# Altium PCB PCB4.0.PcbDoc (part 2 of 4)
Units mm, origin at the board's own origin, x right, y up, seen from the top; angles counter-clockwise.
Board outline 152.4 x 101.6 mm, 4 copper layers (Top Layer, Mid-Layer 1, Mid-Layer 2, Bottom Layer); 258 components, 506 nets, 1709 pads, 919 vias.
Unrouted connection lines stored in the file: 79.
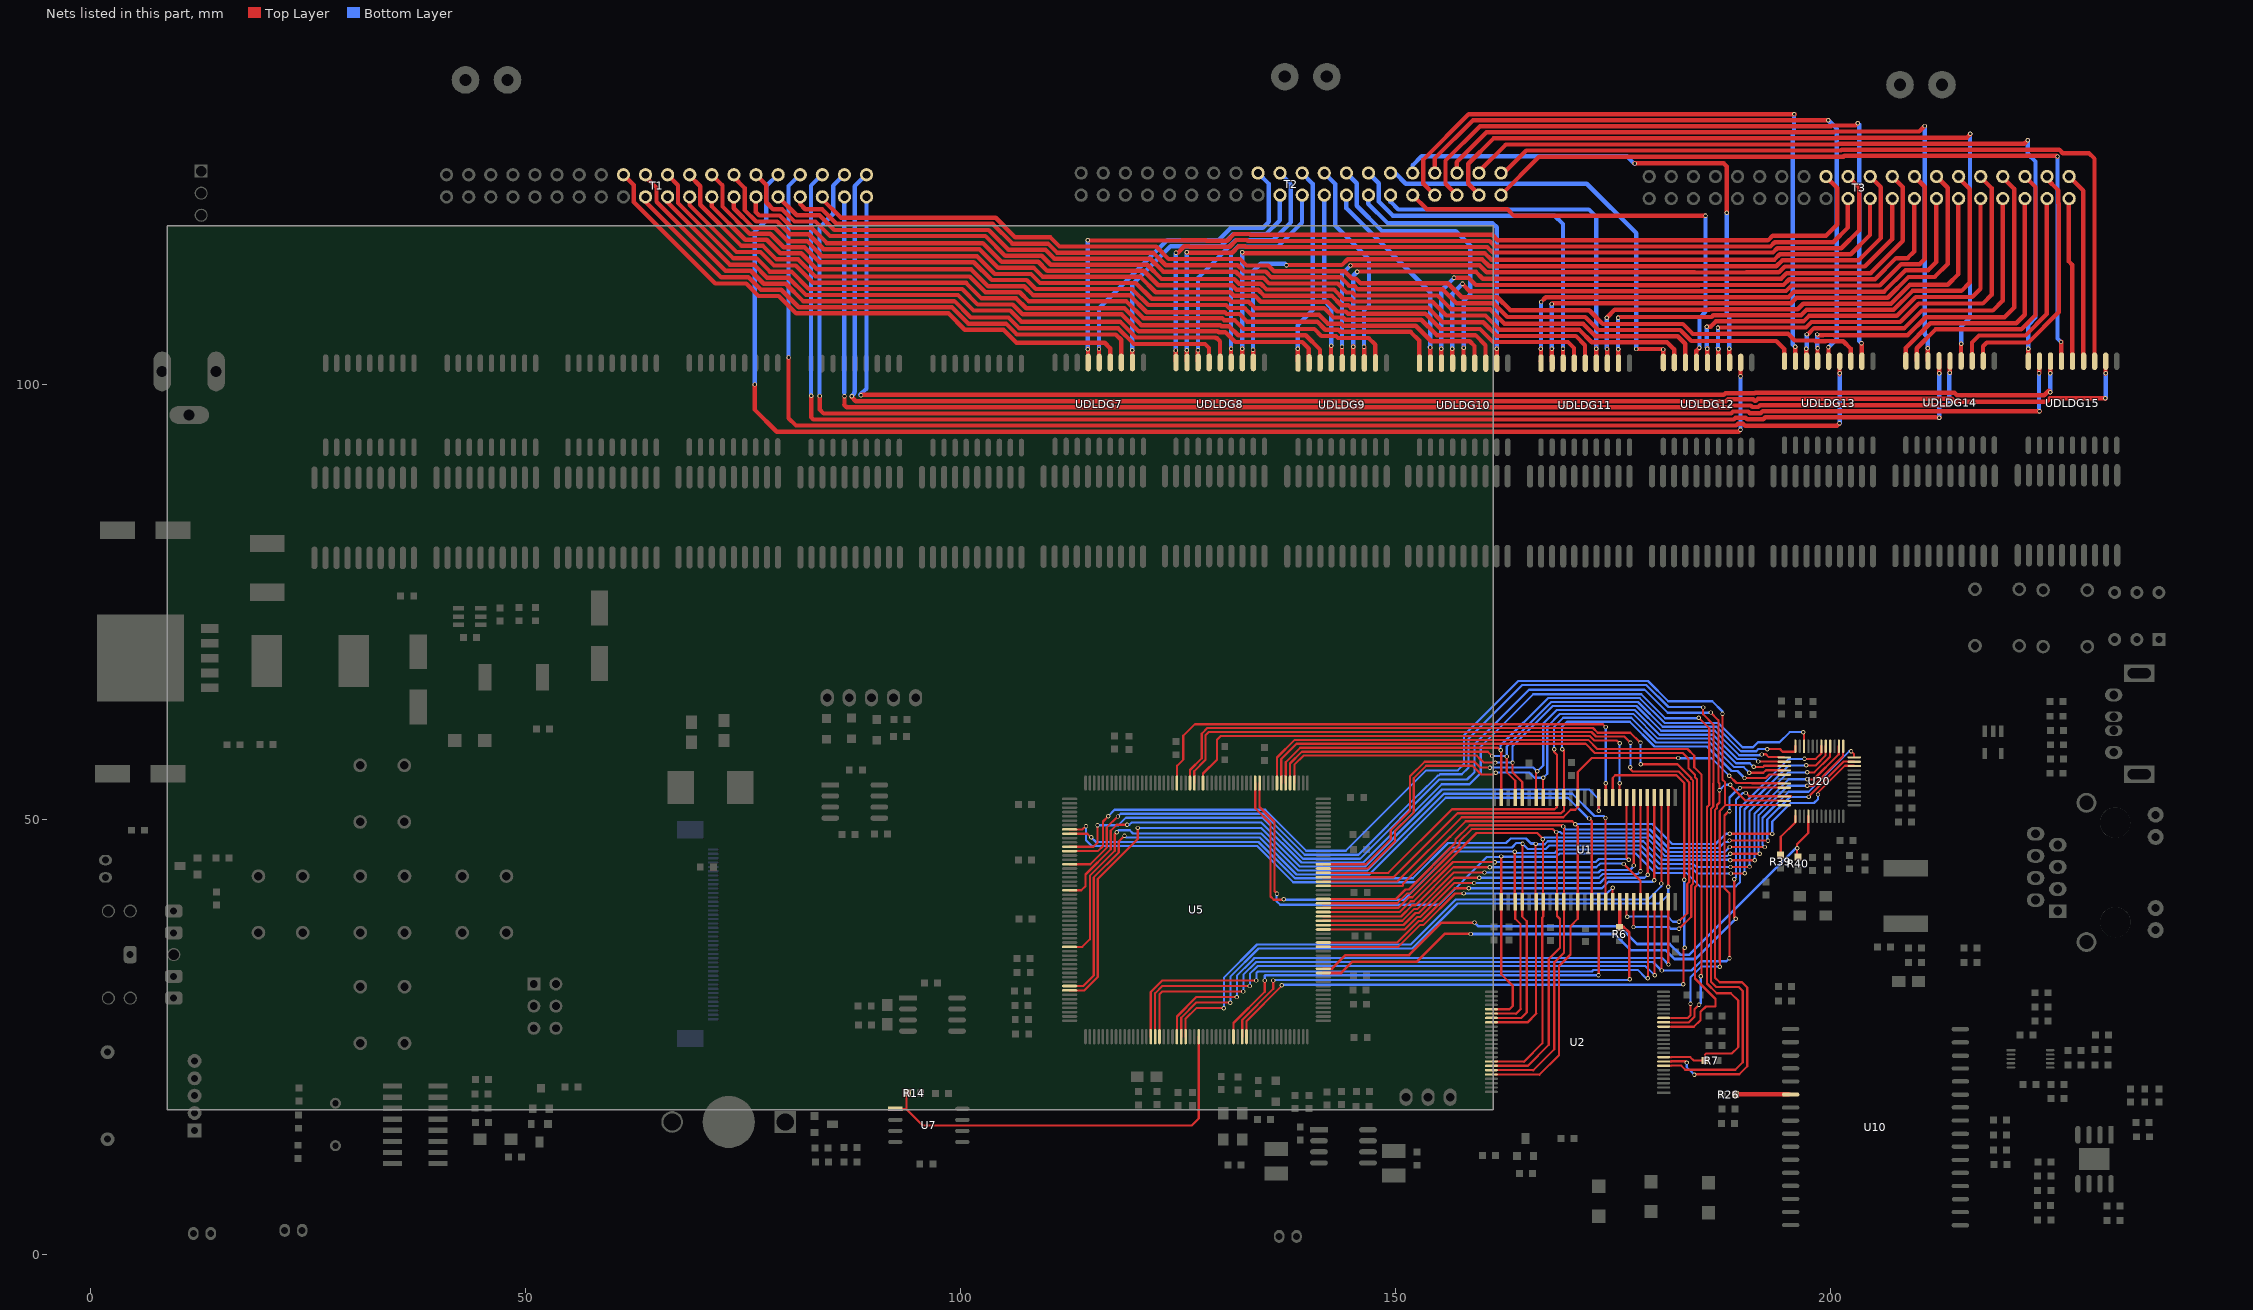
[diagram p4: the nets of this part, all layers, seen from the top]

## Via types
v1: diameter 0.5, hole 0.3, Top Layer to Bottom Layer, 919 vias

## Nets (pads, with @x,y where several pads share a name; then routed paths per layer and width w, separated by ;. In a path a pad name is that pad's centre, name@x,y a point inside that pad or via, vN(x,y) a via of type N, cw(c..) or ccw(c..) an arc to the next point about the centre after c; other vN are vias at no path point) (continued)
DOT52: T3.29 UDLDG7.15 | length 107.7
  Top Layer w0.5: v1(114.625,116.525) 114.648,116.502 125.378,116.502 125.397,116.521 128.203,116.521 128.253,116.471 130.635,116.471 131.408,117.244 133.217,117.244 133.321,117.14 157.644,117.14 157.648,117.144 161.081,117.144 161.718,116.507 192.769,116.507 193.312,117.05 199.45,117.05 200.725,118.325 200.725,122.525 199.42,123.83 T3.29@199.42,123.875 ; UDLDG7.15@114.635,102.502 v1@114.635,104.04
  Bottom Layer w0.5: v1(114.625,104) v1(114.625,116.525)
DOT53: T2.29 UDLDG7.14 | length 36
  Top Layer w0.5: UDLDG7.14@115.905,102.502 v1@115.905,104.047
  Bottom Layer w0.5: v1(115.9,104.025) 115.9,108.7 123.725,116.525 129.625,116.525 131.042,117.942 134.717,117.942 135.42,118.645 135.42,123 T2.29@134.145,124.275
DOT54: T1.29 UDLDG7.13 | length 67
  Top Layer w0.5: T1.29@61.22,124.075 62.43,122.865 62.43,120.92 71.8,111.55 75.35,111.55 76.775,110.125 79.1,110.125 81.094,108.131 89.344,108.131 89.35,108.125 98.6,108.125 100.477,106.248 104.926,106.248 106.424,104.75 116.55,104.75 117.175,104.125 UDLDG7.13@117.175,102.502
DOT55: T1.10 UDLDG7.12 | length 64.4
  Top Layer w0.5: T1.10@63.76,121.535 63.76,120.99 72.475,112.275 75.612,112.275 77.062,110.825 79.387,110.825 81.383,108.829 89.821,108.829 89.825,108.825 99,108.825 100.879,106.946 105.215,106.946 106.461,105.7 117.826,105.7 118.445,105.081 UDLDG7.12@118.445,102.502
DOT56: T2.10 UDLDG7.11 | length 31.9
  Top Layer w0.5: UDLDG7.11@119.715,102.502 v1@119.715,103.892
  Bottom Layer w0.5: v1(119.725,103.875) 119.725,111.425 124.125,115.825 129.912,115.825 131.331,117.244 133.217,117.244 133.232,117.229 135.079,117.229 136.685,118.835 T2.10@136.685,121.735
DOT57: T3.10 UDLDG8.18 | length 94.9
  Top Layer w0.5: UDLDG8.18@124.725,102.602 v1@124.725,103.9 ; v1(124.75,115.1) 124.963,115.1 125.686,115.823 126.264,115.823 126.312,115.775 127.962,115.775 127.964,115.773 130.924,115.773 131.697,116.546 132.928,116.546 133.032,116.442 157.933,116.442 157.937,116.446 160.792,116.446 161.429,115.809 193.058,115.809 193.549,116.3 200.275,116.3 201.96,117.985 T3.10@201.96,121.335
  Bottom Layer w0.5: v1(124.725,103.85) v1@124.725,115.05
DOT58: T3.30 UDLDG8.17 | length 98.2
  Top Layer w0.5: v1@125.975,115.075 131.213,115.075 131.986,115.848 132.639,115.848 132.743,115.744 158.222,115.744 158.226,115.748 160.503,115.748 161.14,115.111 193.347,115.111 193.838,115.602 201.202,115.602 203.25,117.65 203.25,122.585 T3.30@201.96,123.875 ; UDLDG8.17@125.995,102.602 v1@125.995,103.87
  Bottom Layer w0.5: v1(125.975,115.125) 125.979,115.125 126,115.104 v1(126,103.9)
DOT59: T2.30 UDLDG8.16 | length 29.1
  Top Layer w0.5: UDLDG8.16@127.265,102.602 v1@127.265,103.892
  Bottom Layer w0.5: v1(127.275,103.9) 127.275,112.2 131.621,116.546 132.928,116.546 132.966,116.508 135.858,116.508 137.95,118.6 137.95,122.975 136.685,124.24 T2.30@136.685,124.275
DOT60: T1.30 UDLDG8.15 | length 75.6
  Top Layer w0.5: T1.30@63.76,124.075 63.76,123.865 65.05,122.575 65.05,120.95 72.975,113.025 75.875,113.025 77.377,111.523 79.902,111.523 81.898,109.527 99.285,109.527 101.168,107.644 105.504,107.644 106.75,106.398 118.115,106.398 119.913,104.6 128.075,104.6 128.535,104.14 UDLDG8.15@128.535,102.602
DOT61: T1.11 UDLDG8.14 | length 73.1
  Top Layer w0.5: T1.11@66.3,121.535 66.3,120.9 73.475,113.725 76.25,113.725 77.754,112.221 80.229,112.221 82.225,110.225 99.7,110.225 101.475,108.45 105.7,108.45 106.975,107.175 118.325,107.175 120.152,105.348 129.294,105.348 129.391,105.251 129.474,105.251 129.805,104.92 UDLDG8.14@129.805,102.602
DOT62: T2.11 UDLDG8.13 | length 25.3
  Top Layer w0.5: UDLDG8.13@131.075,102.602 v1@131.075,104.1
  Bottom Layer w0.5: v1(131.075,104.075) 131.075,115 131.923,115.848 132.639,115.848 132.677,115.81 136.485,115.81 139.225,118.55 T2.11@139.225,121.735
DOT63: T3.11 UDLDG8.12 | length 90.5
  Top Layer w0.5: UDLDG8.12@132.345,102.602 v1@132.345,104.095 ; v1(132.35,115.15) 132.454,115.046 158.511,115.046 158.515,115.05 160.214,115.05 160.964,114.3 193.523,114.3 194.127,114.904 202.279,114.904 204.5,117.125 T3.11@204.5,121.335
  Bottom Layer w0.5: v1(132.35,104.05) v1(132.35,115.15)
DOT64: T3.31 UDLDG8.11 | length 92.5
  Top Layer w0.5: UDLDG8.11@133.615,102.602 v1@133.615,103.96 ; v1@137.55,113.675 143.813,113.675 144.486,114.348 158.8,114.348 158.802,114.35 159.927,114.35 160.752,113.525 184.079,113.525 184.109,113.555 190.541,113.555 190.571,113.525 193.736,113.525 194.417,114.206 203.181,114.206 205.75,116.775 205.75,122.625 T3.31@204.5,123.875
  Bottom Layer w0.5: v1(133.6,103.925) 133.6,112.95 134.475,113.825 137.275,113.825 v1(137.45,113.65)
DOT65: T2.31 UDLDG9.18 | length 22.9
  Top Layer w0.5: UDLDG9.18@138.75,102.602 v1(138.75,104.05)
  Bottom Layer w0.5: v1@138.75,104.025 138.75,106.775 140.475,108.5 140.475,123 139.225,124.25 T2.31@139.225,124.275
DOT66: T1.31 UDLDG9.17 | length 84.7
  Top Layer w0.5: T1.31@66.3,124.075 67.525,122.85 67.525,120.8 73.85,114.475 76.525,114.475 78.081,112.919 80.556,112.919 82.55,110.925 100.173,110.925 101.95,109.148 105.989,109.148 107.137,108 118.525,108 120.45,106.075 129.555,106.075 129.681,105.949 130.426,105.949 131.55,104.825 139.25,104.825 140.02,104.055 UDLDG9.17@140.02,102.602
DOT67: T1.12 UDLDG9.16 | length 81.6
  Top Layer w0.5: T1.12@68.84,121.535 68.84,120.585 74.25,115.175 77,115.175 78.55,113.625 81.05,113.625 83.052,111.623 100.627,111.623 102.404,109.846 106.402,109.846 107.55,108.698 118.827,108.698 120.752,106.773 129.844,106.773 129.97,106.647 130.853,106.647 131.9,105.6 139.65,105.6 141.29,103.96 UDLDG9.16@141.29,102.602
DOT68: T2.12 UDLDG9.15 | length 19.4
  Top Layer w0.5: UDLDG9.15@142.56,102.602 v1@142.56,104.325
  Bottom Layer w0.5: T2.12@141.765,121.735 141.765,109.585 142.575,108.775 v1@142.575,104.425
  other v1: 142.575,104.4
DOT69: T3.12 UDLDG9.14 | length 80.3
  Top Layer w0.5: v1@143.825,104.225 143.83,104.22 UDLDG9.14@143.83,102.602 ; v1@144.775,113.65 144.777,113.648 145.864,113.648 145.866,113.65 159.625,113.65 160.448,112.827 184.368,112.827 184.37,112.825 190.28,112.825 190.282,112.827 194.025,112.827 194.698,113.5 203.9,113.5 207.04,116.64 T3.12@207.04,121.335
  Bottom Layer w0.5: v1(143.825,104.275) 143.825,112.65 v1(144.8,113.625)
DOT70: T3.32 UDLDG9.13 | length 84
  Top Layer w0.5: UDLDG9.13@145.1,102.602 v1@145.1,104.375 ; v1@145.575,112.95 145.6,112.925 156.434,112.925 156.436,112.923 157.039,112.923 ; 157.097,112.921 157.099,112.923 159.223,112.923 159.225,112.921 ; 158.547,112.925 159.175,112.925 160,112.1 184.628,112.1 184.655,112.073 184.751,112.073 184.762,112.084 190.006,112.084 190.022,112.1 194.285,112.1 194.935,112.75 204.575,112.75 208.275,116.45 208.275,122.64 T3.32@207.04,123.875
  Bottom Layer w0.5: v1(145.125,104.3) 145.125,112.45 v1(145.575,112.9)
DOT71: T2.32 UDLDG9.12 | length 24.1
  Top Layer w0.5: UDLDG9.12@146.37,102.602 v1@146.37,104.295
  Bottom Layer w0.5: T2.32@141.765,124.275 143.05,122.99 143.05,118.225 146.925,114.35 146.925,109.025 146.35,108.45 v1(146.35,104.275)
DOT72: T1.32 UDLDG9.11 | length 90.1
  Top Layer w0.5: T1.32@68.84,124.075 68.84,123.96 70.075,122.725 70.075,120.6 74.802,115.873 77.289,115.873 78.839,114.323 81.339,114.323 83.312,112.35 101.05,112.35 102.856,110.544 106.802,110.544 107.846,109.5 119.05,109.5 121,107.55 130.054,107.55 130.259,107.345 131.48,107.345 132.5,106.325 140.65,106.325 141.45,105.525 143.129,105.525 143.359,105.295 146.88,105.295 147.64,104.535 UDLDG9.11@147.64,102.602
DOT73: T1.13 UDLDG10.18 | length 91.2
  Top Layer w0.5: T1.13@71.38,121.535 71.38,120.445 75.25,116.575 77.725,116.575 79.279,115.021 81.679,115.021 83.525,113.175 101.225,113.175 103.158,111.242 107.308,111.242 108.33,110.22 119.418,110.22 121.39,108.248 130.343,108.248 130.548,108.043 132.032,108.043 132.9,107.175 140.975,107.175 141.9,106.25 143.391,106.25 143.648,105.993 151.707,105.993 152.7,105 UDLDG10.18@152.7,102.577
DOT74: T2.13 UDLDG10.17 | length 23.3
  Top Layer w0.5: UDLDG10.17@153.97,102.577 v1@153.97,104.205
  Bottom Layer w0.5: T2.13@144.305,121.735 144.305,120.22 153.975,110.55 153.975,104.175 v1@153.9,104.25
  other v1: 153.975,104.2
DOT75: T3.13 UDLDG10.16 | length 71.2
  Top Layer w0.5: UDLDG10.16@155.24,102.577 v1@155.24,104.11 ; v1(156.7,112.2) 156.723,112.223 158.352,112.223 159.2,111.375 177.786,111.375 177.794,111.367 184.882,111.367 184.89,111.375 185.04,111.375 185.051,111.386 194.558,111.386 195.222,112.05 205.079,112.05 207.5,114.471 208.821,114.471 209.58,115.23 T3.13@209.58,121.335
  Bottom Layer w0.5: v1(155.225,104.075) 155.225,110.725 v1(156.7,112.2)
DOT76: T3.33 UDLDG10.15 | length 74.5
  Top Layer w0.5: UDLDG10.15@156.51,102.577 v1@156.51,104.065 ; v1(157.675,111.525) 157.773,111.427 157.773,111.377 158.475,110.675 177.498,110.675 177.504,110.669 185.171,110.669 185.179,110.677 185.329,110.677 185.34,110.688 194.847,110.688 195.484,111.325 205.627,111.325 208.075,113.773 210.198,113.773 210.79,114.365 210.79,122.665 T3.33@209.58,123.875
  Bottom Layer w0.5: v1(156.5,104.05) 156.5,110.35 v1(157.675,111.525)
DOT77: T2.33 UDLDG10.14 | length 32.9
  Top Layer w0.5: UDLDG10.14@157.78,102.577 v1@157.78,104.195
  Bottom Layer w0.5: T2.33@144.305,124.275 145.515,123.065 145.515,120.485 148.425,117.575 156.9,117.575 158.55,115.925 158.55,110.275 157.8,109.525 v1(157.8,104.15)
DOT78: T1.33 UDLDG10.13 | length 99.1
  Top Layer w0.5: T1.33@71.38,124.075 72.625,122.83 72.625,120.4 75.75,117.275 78.125,117.275 79.675,115.725 82.05,115.725 83.775,114 101.515,114 103.565,111.95 107.587,111.95 108.619,110.918 119.707,110.918 121.55,109.075 130.503,109.075 130.837,108.741 132.634,108.741 133.425,107.95 141.187,107.95 142.189,106.948 143.68,106.948 143.937,106.691 152.309,106.691 154.075,104.925 158.5,104.925 159.05,104.375 UDLDG10.13@159.05,102.577
DOT79: T1.14 UDLDG10.12 | length 96.1
  Top Layer w0.5: T1.14@73.92,121.535 73.92,120.205 76.15,117.975 78.575,117.975 80.127,116.423 82.352,116.423 84.077,114.698 101.875,114.698 103.925,112.648 108.093,112.648 109.125,111.616 120.134,111.616 121.95,109.8 130.765,109.8 131.126,109.439 133.111,109.439 133.825,108.725 141.775,108.725 142.854,107.646 143.969,107.646 144.226,107.389 152.936,107.389 154.702,105.623 159.152,105.623 160.32,104.455 UDLDG10.12@160.32,102.577
DOT80: T2.14 UDLDG10.11 | length 32.4
  Top Layer w0.5: UDLDG10.11@161.59,102.577 161.59,104.09 v1@161.6,104.1
  Bottom Layer w0.5: T2.14@146.845,121.735 146.845,120.705 149.05,118.5 161.125,118.5 161.6,118.025 v1@161.6,104.025
  other v1: 161.6,104.05
DOT81: T3.14 UDLDG11.18 | length 61.5
  Top Layer w0.5: UDLDG11.18@166.675,102.627 166.7,102.652 v1@166.7,104.127 ; v1(166.7,109.425) 167.246,109.971 185.46,109.971 185.468,109.979 185.618,109.979 185.629,109.99 195.136,109.99 195.771,110.625 206.125,110.625 208.575,113.075 211.175,113.075 212.12,114.02 T3.14@212.12,121.335
  Bottom Layer w0.5: v1(166.675,104.075) 166.7,104.1 v1(166.7,109.425)
DOT82: T3.34 UDLDG11.17 | length 64.6
  Top Layer w0.5: v1(167.925,109.2) 167.998,109.273 185.75,109.273 185.758,109.281 185.908,109.281 185.919,109.292 195.425,109.292 196.06,109.927 206.552,109.927 208.925,112.3 211.925,112.3 213.425,113.8 213.425,122.57 T3.34@212.12,123.875 ; UDLDG11.17@167.945,102.627 v1@167.945,104.08
  Bottom Layer w0.5: v1(167.925,109.2) 167.925,104.15 167.975,104.1 v1(167.95,104.075)
DOT83: T2.34 UDLDG11.16 | length 41.8
  Top Layer w0.5: UDLDG11.16@169.215,102.627 v1@169.215,104.09
  Bottom Layer w0.5: T2.34@146.845,124.275 148.055,123.065 148.055,120.97 149.675,119.35 168.275,119.35 169.225,118.4 v1(169.225,104.075)
DOT84: T1.34 UDLDG11.15 | length 108
  Top Layer w0.5: T1.34@73.92,124.075 73.92,123.78 75.175,122.525 75.175,120 76.502,118.673 78.927,118.673 80.375,117.225 82.55,117.225 84.275,115.5 102.171,115.5 104.325,113.346 108.418,113.346 109.45,112.314 120.661,112.314 122.425,110.55 131.002,110.55 131.415,110.137 133.811,110.137 134.486,109.462 142.163,109.462 143.281,108.344 144.258,108.344 144.515,108.087 153.411,108.087 155.173,106.325 159.675,106.325 161.175,104.825 169.8,104.825 170.485,104.14 UDLDG11.15@170.485,102.627
DOT85: T1.15 UDLDG11.14 | length 105.2
  Top Layer w0.5: T1.15@76.46,121.535 76.46,119.765 76.85,119.375 79.212,119.375 80.637,117.95 82.875,117.95 84.627,116.198 102.552,116.198 104.706,114.044 108.906,114.044 109.938,113.012 121.038,113.012 122.7,111.35 131.189,111.35 131.704,110.835 134.19,110.835 134.865,110.16 142.628,110.16 143.746,109.042 144.547,109.042 144.804,108.785 153.7,108.785 155.385,107.1 160.05,107.1 161.627,105.523 170.089,105.523 170.091,105.525 170.7,105.525 171.755,104.47 UDLDG11.14@171.755,102.627
DOT86: T2.15 UDLDG11.13 | length 41.8
  Top Layer w0.5: UDLDG11.13@173.025,102.627 v1@173.025,104.1
  Bottom Layer w0.5: T2.15@149.385,121.735 149.385,120.965 150.3,120.05 172.2,120.05 173.025,119.225 v1(173.025,104.075)
DOT87: T3.15 UDLDG11.12 | length 56.1
  Top Layer w0.5: v1(174.25,107.625) 175.177,108.552 186.016,108.552 186.047,108.583 ; v1@174.275,104.075 174.295,104.055 UDLDG11.12@174.295,102.627 ; 186.208,108.594 196.194,108.594 196.829,109.229 206.917,109.229 209.088,111.4 213.425,111.4 214.66,112.635 T3.15@214.66,121.335
  Bottom Layer w0.5: v1(174.25,107.625) 174.25,104.05 v1(174.275,104.025)
DOT88: T3.35 UDLDG11.11 | length 59.9
  Top Layer w0.5: v1(175.55,107.625) 175.625,107.7 186.301,107.7 186.497,107.896 196.571,107.896 197.206,108.531 207.206,108.531 209.377,110.702 215.002,110.702 215.975,111.675 215.975,122.4 214.66,123.715 T3.35@214.66,123.875 ; UDLDG11.11@175.565,102.627 v1@175.565,104.035
  Bottom Layer w0.5: v1(175.55,107.625) 175.55,104.075 175.6,104.025 v1(175.575,104)
DOT89: T2.35 UDLDG12.18 | length 48.9
  Top Layer w0.5: v1(177.65,104.025) 180.675,104.025 v1(180.725,103.975) UDLDG12.18@180.725,102.602
  Bottom Layer w0.5: T2.35@149.385,124.275 149.9,124.275 151.15,123.025 171.95,123.025 177.652,117.323 v1@177.652,104.025
DOT90: T1.35 UDLDG12.17 | length 116.4
  Top Layer w0.5: T1.35@76.46,124.075 77.67,122.865 77.67,120.88 78.477,120.073 79.501,120.073 80.899,118.675 83.325,118.675 84.992,117.008 102.842,117.008 105.108,114.742 109.318,114.742 110.35,113.71 121.44,113.71 123.075,112.075 131.452,112.075 131.994,111.533 134.481,111.533 135.156,110.858 142.917,110.858 144.025,109.75 144.827,109.75 145.094,109.483 154.192,109.483 155.792,107.883 160.317,107.883 161.979,106.221 169.8,106.221 169.802,106.223 171.102,106.223 172.525,104.8 181.175,104.8 181.995,103.98 UDLDG12.17@181.995,102.602
DOT91: T1.16 UDLDG12.16 | length 113.3
  Top Layer w0.5: T1.16@79,121.535 79.026,121.535 81.161,119.4 83.775,119.4 85.469,117.706 103.219,117.706 105.485,115.44 109.743,115.44 110.775,114.408 121.792,114.408 123.3,112.9 131.614,112.9 132.283,112.231 134.77,112.231 135.445,111.556 143.319,111.556 144.35,110.525 145.039,110.525 145.383,110.181 154.792,110.181 156.392,108.581 160.844,108.581 162.506,106.919 169.511,106.919 169.513,106.921 171.529,106.921 172.946,105.504 182.396,105.504 183.265,104.635 UDLDG12.16@183.265,102.602
DOT92: T2.16 UDLDG12.15 | length 51.8
  Top Layer w0.5: T2.16@151.925,121.735 153.56,120.1 162.825,120.1 163.6,119.325 v1@185.575,119.325 ; UDLDG12.15@184.535,102.602 184.535,103.81 v1@184.85,104.125
  Bottom Layer w0.5: v1(184.9,104.175) 184.9,107.6 185.6,108.3 v1(185.6,119.35)
DOT93: T3.16 UDLDG12.14 | length 47.6
  Top Layer w0.5: v1(185.75,106.6) 186.188,106.6 186.786,107.198 196.86,107.198 197.495,107.833 207.583,107.833 209.754,110.004 216.254,110.004 217.2,110.95 T3.16@217.2,121.335 ; UDLDG12.14@185.805,102.602 v1@185.805,104.095
  Bottom Layer w0.5: v1(185.75,106.6) 185.75,104.25 v1@185.8,104.2
  other v1: 185.8,104.075
DOT94: T3.36 UDLDG12.13 | length 51
  Top Layer w0.5: UDLDG12.13@187.075,102.602 v1@187.075,104 ; v1@187.075,106.5 197.149,106.5 197.774,107.125 207.975,107.125 210.1,109.25 217.475,109.25 218.475,110.25 218.475,122.525 217.2,123.8 T3.36@217.2,123.875
  Bottom Layer w0.5: v1(187.025,106.45) 187.025,104.225 186.975,104.175 187.1,104.05 v1(187.05,104)
DOT95: T2.36 UDLDG12.12 | length 60.4
  Top Layer w0.5: v1(177.45,125.35) 177.475,125.375 187.675,125.375 188.05,125 v1@188.05,119.7 ; UDLDG12.12@188.345,102.602 v1@188.345,104.07
  Bottom Layer w0.5: T2.36@151.925,124.275 151.925,125.125 152.975,126.175 176.575,126.175 v1@177.45,125.3 ; v1(188.025,119.675) 188.025,108.05 188.325,107.75 v1(188.325,104.075)
DOT96: T1.36 UDLDG12.11 | length 150.4
  Top Layer w0.5: v1(76.325,99.95) 76.325,97.075 78.871,94.529 189.404,94.529 v1(189.625,94.75) ; v1@189.615,100.885 189.615,102.602 UDLDG12.11@189.625,102.592
  Bottom Layer w0.5: v1(76.325,99.95) 76.325,117.475 77.67,118.82 77.67,122.745 T1.36@79,124.075 ; v1(189.625,94.75) v1(189.625,100.9)
DOT97: T1.17 UDLDG13.18 | length 122.2
  Top Layer w0.5: T1.17@81.54,121.535 81.54,120.71 82.152,120.098 84.077,120.098 85.771,118.404 103.684,118.404 105.95,116.138 110.043,116.138 111.075,115.106 122.119,115.106 123.575,113.65 131.851,113.65 132.572,112.929 135.059,112.929 135.734,112.254 143.696,112.254 144.675,111.275 145.276,111.275 145.672,110.879 155.396,110.879 156.996,109.279 161.246,109.279 162.825,107.7 171.775,107.7 173.273,106.202 182.698,106.202 183.95,104.95 193.725,104.95 194.65,104.025 UDLDG13.18@194.65,102.652
DOT98: T2.17 UDLDG13.17 | length 78
  Top Layer w0.5: T2.17@154.465,121.735 153.175,123.025 153.175,125.8 158.396,131.021 v1@195.85,131.021 ; UDLDG13.17@195.92,102.652 v1@195.92,104.305
  Bottom Layer w0.5: v1(195.775,131.025) 195.775,129 195.625,128.85 195.625,104.55 v1(195.9,104.275)
DOT99: T3.17 UDLDG13.16 | length 38.9
  Top Layer w0.5: UDLDG13.16@197.19,102.652 197.19,104.065 v1@197.2,104.075 ; v1@197.35,105.7 198.075,106.425 208.45,106.425 210.475,108.45 218.625,108.45 219.74,109.565 T3.17@219.74,121.335
  Bottom Layer w0.5: v1(197.175,104.05) 197.225,104.1 v1(197.225,105.7)
DOT100: T3.37 UDLDG13.15 | length 42.7
  Top Layer w0.5: v1(198.45,105.7) 198.525,105.625 199.136,105.625 199.152,105.641 200.308,105.641 200.324,105.625 208.85,105.625 210.9,107.675 219.95,107.675 221.07,108.795 221.07,121.836 221.075,121.841 221.075,122.425 219.74,123.76 T3.37@219.74,123.875 ; UDLDG13.15@198.46,102.652 v1@198.46,104.165
  Bottom Layer w0.5: v1(198.45,105.7) 198.45,104.2 198.425,104.175 v1(198.475,104.125)
DOT101: T2.37 UDLDG13.14 | length 77.2
  Top Layer w0.5: T2.37@154.465,124.275 154.465,125.915 158.873,130.323 v1@199.725,130.323 ; UDLDG13.14@199.73,102.652 v1@199.73,104.245
  Bottom Layer w0.5: v1(199.7,130.325) 200.7,129.325 200.7,105.2 v1(199.725,104.225)
DOT102: T1.37 UDLDG13.13 | length 157.2
  Top Layer w0.5: v1(80.225,103.05) 80.225,96.075 81.073,95.227 189.115,95.227 189.336,95.448 189.914,95.448 190.158,95.204 200.704,95.204 v1@200.95,95.45 ; v1@201,101.125 UDLDG13.13@201,102.652
  Bottom Layer w0.5: v1(80.225,103.05) 80.225,122.76 T1.37@81.54,124.075 ; v1(201,95.475) 201.025,95.5 v1(201.025,101.225)
DOT103: T1.18 UDLDG13.12 | length 127
  Top Layer w0.5: T1.18@84.08,121.535 84.08,121.27 86.248,119.102 104.034,119.102 106.286,116.85 110.318,116.85 111.364,115.804 122.471,115.804 123.898,114.377 132.111,114.377 132.861,113.627 135.348,113.627 136.023,112.952 144.123,112.952 144.95,112.125 145.413,112.125 145.961,111.577 155.973,111.577 157.573,109.977 161.673,109.977 163.175,108.475 172.225,108.475 173.8,106.9 183,106.9 184.148,105.752 187.314,105.752 187.337,105.775 195.075,105.775 195.847,105.003 196.935,105.003 ; UDLDG13.12@202.27,102.652 202.27,104.08 201.423,104.927 200.035,104.927 200.019,104.943 199.441,104.943 199.425,104.927 198.236,104.927 198.16,105.003 197.515,105.003 197.514,105.002 196.936,105.002 ; 196.935,105.003 196.936,105.002
DOT104: T2.18 UDLDG13.11 | length 81.2
  Top Layer w0.5: T2.18@157.005,121.735 155.725,123.015 155.725,125.675 159.675,129.625 200.014,129.625 200.104,129.715 202.84,129.715 v1(203.1,129.975) v1@203.125,129.975 ; UDLDG13.11@203.54,102.652 v1@203.54,104.69
  Bottom Layer w0.5: v1(203.1,129.975) 203.25,129.825 203.25,104.95 v1(203.525,104.675)
DOT105: T3.18 UDLDG14.18 | length 30.1
  Top Layer w0.5: UDLDG14.18@208.6,102.677 208.6,104.15 211.427,106.977 221.302,106.977 222.28,107.955 T3.18@222.28,121.335
DOT106: T3.38 UDLDG14.17 | length 33.1
  Top Layer w0.5: UDLDG14.17@209.87,102.677 209.87,104.12 212.029,106.279 221.879,106.279 223.525,107.925 223.525,122.63 T3.38@222.28,123.875
DOT107: T2.38 UDLDG14.16 | length 83.9
  Top Layer w0.5: T2.38@157.005,124.275 157.005,125.505 160.427,128.927 200.303,128.927 200.393,129.017 210.167,129.017 v1(210.8,129.65) v1@210.825,129.65 ; UDLDG14.16@211.14,102.677 v1@211.14,104.185
  Bottom Layer w0.5: v1(210.8,129.65) 210.8,105.725 211.15,105.375 v1(211.15,104.125)
DOT108: T1.38 UDLDG14.15 | length 165.1
  Top Layer w0.5: v1(82.825,98.65) 82.825,96.225 82.8,96.2 83.075,95.925 188.826,95.925 189.047,96.146 190.203,96.146 190.389,95.96 192.246,95.96 192.459,96.173 202.198,96.173 ; 202.198,96.175 212.075,96.175 212.05,96.15 v1@212.5,96.15 ; v1@212.46,101.215 UDLDG14.15@212.46,102.702
  Bottom Layer w0.5: v1@82.805,98.675 82.805,122.8 T1.38@84.08,124.075 ; v1(212.45,101.225) 212.51,101.165 212.475,101.129 v1(212.475,96.125)
DOT109: T1.19 UDLDG14.14 | length 156.1
  Top Layer w0.5: v1(86.65,98.6) 86.65,97.675 86.6,97.625 86.904,97.321 188.248,97.321 188.469,97.542 190.781,97.542 190.967,97.356 191.667,97.356 191.88,97.569 201.618,97.569 201.62,97.571 v1@213.65,97.571 ; v1@213.675,101.275 213.68,101.28 213.68,102.677 UDLDG14.14@213.675,102.672
  Bottom Layer w0.5: 86.62,98.995 T1.19@86.62,121.535 ; v1(213.625,97.6) 213.625,101.171 213.65,101.196 213.61,101.235 v1(213.675,101.3)
DOT110: T2.19 UDLDG14.13 | length 89.7
  Top Layer w0.5: T2.19@159.545,121.735 159.545,121.805 158.325,123.025 158.325,125.325 161.229,128.229 200.592,128.229 200.682,128.319 215.644,128.319 v1@216.023,128.698 ; UDLDG14.13@214.95,102.677 v1@214.95,104.65
  Bottom Layer w0.5: v1(214.975,104.65) 214.975,106.6 215.99,107.615 215.99,128.715 v1(216.025,128.75)
DOT111: T3.19 UDLDG14.12 | length 25.3
  Top Layer w0.5: UDLDG14.12@216.22,102.677 216.22,104.77 217.031,105.581 222.356,105.581 224.82,108.045 T3.19@224.82,121.335
DOT112: T3.39 UDLDG14.11 | length 28.2
  Top Layer w0.5: UDLDG14.11@217.49,102.677 217.49,104.34 217.925,104.775 222.7,104.775 226.175,108.25 226.175,120.784 226.15,120.809 226.15,122.25 224.82,123.58 T3.39@224.82,123.875
DOT113: T2.39 UDLDG15.18 | length 90.8
  Top Layer w0.5: T2.39@159.545,124.275 159.545,124.42 162.656,127.531 200.881,127.531 200.971,127.621 222.221,127.621 v1@222.6,128 ; UDLDG15.18@222.675,102.652 v1@222.675,104.052
  Bottom Layer w0.5: v1(222.625,128.025) 222.625,126.475 223.525,125.575 223.525,107.65 222.675,106.8 v1(222.675,104.05)
DOT114: T1.39 UDLDG15.17 | length 174.6
  Top Layer w0.5: v1(83.8,98.625) 83.8,97.075 84.252,96.623 188.537,96.623 188.758,96.844 190.492,96.844 190.678,96.658 191.956,96.658 192.169,96.871 201.907,96.871 201.909,96.873 v1@223.998,96.873 ; v1@223.945,101.23 UDLDG15.17@223.945,102.652
  Bottom Layer w0.5: v1(83.8,98.625) 83.775,98.65 83.775,118 85.35,119.575 85.35,122.805 T1.39@86.62,124.075 ; v1@223.925,96.875 v1(223.925,101.25)
  other v1: 223.975,96.875
DOT115: T1.20 UDLDG15.16 | length 163.8
  Top Layer w0.5: v1@88.6,98.75 187.702,98.75 187.89,98.938 191.275,98.938 191.333,98.996 214.203,98.996 214.499,98.7 224.525,98.7 225.05,99.225 v1@225.225,99.05 ; v1@225.215,101.235 UDLDG15.16@225.215,102.652
  Bottom Layer w0.5: v1@88.475,98.775 89.175,99.475 89.175,121.362 89.16,121.377 T1.20@89.16,121.535 ; v1(225.2,99.075) 225.2,101.225 v1(225.225,101.25)
  other v1: 88.55,98.725
DOT116: T2.20 UDLDG15.15 | length 89.6
  Top Layer w0.5: T2.20@162.085,121.735 166.485,126.135 201.46,126.135 201.55,126.225 225.925,126.225 v1@226.025,126.125 ; UDLDG15.15@226.485,102.652 v1@226.485,104.89
  Bottom Layer w0.5: v1(226.05,126.15) 226.05,105.225 v1(226.45,104.825)
DOT117: T3.20 UDLDG15.14 | length 18.8
  Top Layer w0.5: T3.20@227.36,121.335 227.36,114.09 227.755,113.695 UDLDG15.14@227.755,102.652
DOT118: T3.40 UDLDG15.13 | length 21.9
  Top Layer w0.5: T3.40@227.36,123.875 229.025,122.21 UDLDG15.13@229.025,102.652
DOT119: T2.40 UDLDG15.12 | length 93
  Top Layer w0.5: T2.40@162.085,124.275 162.45,124.275 165.008,126.833 201.171,126.833 201.261,126.923 226.264,126.923 226.662,126.525 229.675,126.525 230.295,125.905 UDLDG15.12@230.295,102.652
DOT120: T1.40 UDLDG15.11 | length 175.5
  Top Layer w0.5: v1(87.475,98.6) 87.475,98.498 87.954,98.019 187.958,98.019 188.179,98.24 191.071,98.24 191.257,98.054 191.378,98.054 191.622,98.298 213.914,98.298 214.237,97.975 224.787,97.975 225.164,98.352 231.498,98.352 231.525,98.325 v1(231.55,98.35) ; v1@231.565,101.165 UDLDG15.11@231.565,102.652
  Bottom Layer w0.5: v1@87.475,98.625 87.777,98.927 87.777,99.064 87.85,99.137 87.85,121.014 87.83,121.034 87.83,122.745 T1.40@89.16,124.075 ; v1@231.575,98.35 v1(231.575,101.225)
DRY_BSY: R26.1 U10.6@195.385,18.355 | length 6.1
  Top Layer w0.5: R26.1@189.06,18.375 U10.6@195.15,18.375
ETH_INT: U5.64 U20.34 | length 73
  Top Layer w0.254: v1(188.9,43.075) 188.9,38.725 v1(189.075,38.55) ; v1@190.25,53 190.625,52.625 194.625,52.625 U20.34@195.411,52.625
  Top Layer w0.3: U5.64@141.676,32.322 143.722,32.322 145,33.6 152.4,33.6 155.625,36.825 v1@158.65,36.825
  Bottom Layer w0.254: v1@188.85,43.1 189.098,43.348 189.098,52.223 189.875,53 v1(190.225,53)
  Bottom Layer w0.3: v1(158.6,36.8) 175.15,36.8 177,34.95 181.025,34.95 182.048,33.927 184.452,33.927 v1@189.05,38.525
ETH_RST: R40.2 U5.65 U20.40 | length 68.5
  Top Layer w0.254: R40.2@196.1,45.805 196.1,47.1 197.4,48.4 U20.40@197.4,50.35
  Top Layer w0.3: U5.65@141.676,32.822 142.697,32.822 144.25,34.375 151.525,34.375 155.225,38.075 v1@159.2,38.075
  Bottom Layer w0.3: v1(159.05,38.125) 159.5,37.675 175.7,37.675 177.725,35.65 181.475,35.65 182.7,34.425 183.75,34.425 196,46.675 v1@196.125,46.675
  other v1: 196.125,46.65
F_CS: R14.2 U5.27 U7.1 | length 47.7
  Top Layer w0.254: U7.1@92.171,16.686 93.751,16.686 93.785,16.652 ; R14.2@93.785,18.596 93.785,16.652 ; U5.27@127.351,24.997 127.351,15.587 126.55,14.786 95.651,14.786 93.785,16.652
FMC_A0: U1.23 U5.16 | length 73.1
  Top Layer w0.254: U5.16@121.851,24.997 121.851,30.142 123.166,31.457 v1(133.984,31.457) ; U1.23@178.928,40.487 178.975,40.44 v1@178.975,31.625
  Bottom Layer w0.254: v1(133.984,31.457) 133.984,32.324 134.16,32.5 172.55,32.5 172.725,32.675 177.8,32.675 178.75,31.725 v1(178.95,31.725)
FMC_A1: U1.24 U5.17 | length 73.5
  Top Layer w0.254: U5.17@122.351,24.997 122.351,30.002 123.171,30.822 v1(133.238,30.822) ; U1.24@179.728,40.487 179.75,40.509 v1(179.75,32.05) v1@179.75,32
  Bottom Layer w0.254: v1(133.238,30.822) 133.238,32.217 133.835,32.815 134.148,33.127 178.673,33.127 v1(179.75,32.05)
FMC_A2: U1.25 U5.18 U20.32 | length 107.7
  Top Layer w0.254: U5.18@122.851,24.997 122.851,29.863 123.175,30.187 v1(132.491,30.187) ; v1@180.525,32.6 180.525,40.49 U1.25@180.528,40.487 ; v1@188.3,50.95 187.775,50.425 187.775,42.05 188.35,41.475 188.35,34.125 v1@188.425,34.05 ; v1@189.55,53.625 U20.32@194.625,53.625
  Bottom Layer w0.254: v1(132.491,30.187) 132.491,32.11 133.96,33.579 179.571,33.579 v1(180.55,32.6) 184,32.6 185.075,33.675 188,33.675 v1(188.35,34.025) ; v1(188.35,50.9) 188.35,52.475 189.281,53.406 189.5,53.406 189.559,53.466 v1(189.559,53.578)
FMC_A3: U1.26 U5.22 | length 70.7
  Top Layer w0.254: U5.22@124.851,24.997 124.851,27.324 127.079,29.552 v1(131.744,29.552) ; v1@181.325,33.225 181.325,40.34 181.4,40.415 U1.26@181.328,40.487
  Bottom Layer w0.254: v1(131.744,29.552) 131.744,32.002 133.446,33.704 ; 133.446,33.704 133.773,34.031 180.619,34.031 v1(181.35,33.3)
FMC_A4: U1.29 U5.23 | length 76.9
  Top Layer w0.254: U5.23@125.351,24.997 125.351,27.184 127.084,28.917 v1(130.997,28.917) ; v1(181.325,42.225) 181.325,52.484 U1.29@181.328,52.487
  Bottom Layer w0.254: v1(130.997,28.917) 130.997,31.895 134.237,35.135 151.912,35.135 157.087,40.31 174.825,40.31 174.837,40.298 180.298,40.298 181.325,41.325 v1(181.325,42.225)
FMC_A5: U1.30 U5.24 | length 75.3
  Top Layer w0.254: U5.24@125.851,24.997 125.851,27.045 127.088,28.282 v1(130.251,28.282) ; v1(180.525,42.6) 180.525,52.484 U1.30@180.528,52.487
  Bottom Layer w0.254: v1(130.251,28.282) 130.251,31.788 134.05,35.587 151.725,35.587 156.9,40.762 175.012,40.762 175.024,40.75 179,40.75 180.525,42.275 v1(180.525,42.6)
FMC_A6: U1.31 U5.71 | length 50.5
  Top Layer w0.254: U5.71@141.676,35.822 150.166,35.822 152.646,38.302 153.02,38.302 156.779,42.062 v1(158.4,42.062) ; v1(179.7,42.975) 179.7,52.459 U1.31@179.728,52.487
  Bottom Layer w0.254: v1(158.4,42.062) 173.712,42.062 174.45,42.8 179.525,42.8 v1(179.7,42.975)
FMC_A7: U1.32 U5.74 | length 48.8
  Top Layer w0.254: U5.74@141.676,37.322 151.026,37.322 152.458,38.754 152.832,38.754 156.74,42.662 v1(159,42.662) ; U1.32@178.928,52.487 178.95,52.464 v1(178.95,43.6)
  Bottom Layer w0.254: v1(159,42.662) 173.462,42.662 174.052,43.252 178.602,43.252 v1(178.95,43.6)
FMC_A8: U1.33 U5.75 | length 47.5
  Top Layer w0.254: U5.75@141.676,37.822 150.887,37.822 152.271,39.206 152.645,39.206 156.701,43.262 v1(159.6,43.262) ; v1(178.125,44.025) 178.125,52.484 U1.33@178.128,52.487
  Bottom Layer w0.254: v1(159.6,43.262) 173.337,43.262 173.779,43.704 177.804,43.704 v1(178.125,44.025)
FMC_A9: U1.34 U5.76 | length 46.2
  Top Layer w0.254: U5.76@141.676,38.322 150.747,38.322 152.083,39.658 152.458,39.658 156.662,43.862 v1(160.2,43.862) ; U1.34@177.328,52.487 177.3,52.459 177.35,52.409 v1(177.35,44.675)
  Bottom Layer w0.254: v1(160.2,43.862) 173.298,43.862 173.592,44.156 176.931,44.156 177.328,44.553 177.3,44.58 177.35,44.63 v1(177.35,44.675)
FMC_A10: U1.22 U5.77 | length 42.2
  Top Layer w0.254: U5.77@141.676,38.822 150.608,38.822 151.896,40.11 152.271,40.11 156.622,44.462 v1(160.8,44.462) ; v1(176.2,44.85) 178.128,42.922 U1.22@178.128,40.487
  Bottom Layer w0.254: v1(160.8,44.462) 173.037,44.462 173.487,44.912 176.138,44.912 v1(176.2,44.85)
FMC_A11: U1.35 U5.78 | length 44.9
  Top Layer w0.254: U5.78@141.676,39.322 150.469,39.322 151.709,40.562 152.083,40.562 156.583,45.062 v1(161.4,45.062) ; U1.35@176.528,52.487 176.528,45.597 v1(176.775,45.35)
  Bottom Layer w0.254: v1(161.4,45.062) 172.998,45.062 173.361,45.425 176.7,45.425 v1(176.775,45.35)
FMC_A12: U1.36 U5.129 | length 58.9
  Top Layer w0.254: U5.129@127.851,54.147 127.851,55.238 129.475,56.862 129.475,59.159 129.875,59.559 172.299,59.559 172.825,59.033 174.9,59.033 ; 175.1,59.033 174.9,59.033 ; U1.36@175.728,52.487 v1(175.728,54.109) ; v1(175.728,58.709) 175.404,59.033 174.9,59.033
  Bottom Layer w0.254: v1(175.728,54.109) v1(175.728,58.709)
FMC_A16_CLE: U2.16 U5.111 | length 87.6
  Top Layer w0.254: U5.111@136.851,54.147 136.851,56.901 138.605,58.655 171.82,58.655 172.875,57.6 182.975,57.6 183.65,56.925 183.65,55.85 184.4,55.1 184.4,54.818 184.629,54.589 184.629,42.412 184.4,42.183 184.4,31.675 186.748,29.327 186.748,28.473 185.648,28.473 185.025,27.85 185.025,26.9 184.256,26.131 181.618,26.131
FMC_A17_ALE: U2.17 U5.112 | length 86.2
  Top Layer w0.254: U5.112@136.351,54.147 136.351,57.076 138.382,59.107 172.112,59.107 173.167,58.052 183.523,58.052 184.3,57.275 184.3,55.95 185.15,55.1 v1@185.15,31.825 ; 181.618,26.631 183.67,26.631 184.327,27.288 184.327,28.152 v1@184.8,28.625
  Bottom Layer w0.254: v1(184.85,28.65) 185.05,28.85 v1(185.05,31.925)
FMC_BA0: U1.20 U5.131 | length 90.4
  Top Layer w0.254: U5.131@126.851,54.147 126.851,55.517 128.15,56.816 128.15,59.637 128.525,60.012 172.486,60.012 173.013,59.485 176.265,59.485 v1(176.975,58.775) ; U1.20@176.528,40.487 176.528,38.922 v1@176.6,38.85 ; v1(176.95,55.975) 176.95,55.75 177.211,55.489 182.486,55.489 183.496,54.479 183.496,54.443 183.725,54.214 183.725,42.787 183.496,42.558 183.496,39.196 182.55,38.25 v1@182.55,38.125
  Bottom Layer w0.254: v1(176.6,38.8) 181.25,38.8 181.85,38.2 v1(182.55,38.2) ; v1(176.95,55.975) v1@176.975,55.975 ; v1@176.975,56 v1(176.975,58.775)
FMC_BA1: U1.21 U5.132 | length 92.8
  Top Layer w0.254: U5.132@126.351,54.147 126.351,55.656 127.698,57.003 127.698,59.824 128.338,60.464 172.673,60.464 173.2,59.937 176.95,59.937 v1@178.087,58.8 ; v1@177.328,37.6 U1.21@177.328,40.487 ; v1(178.175,56.3) 182.375,56.3 183.948,54.727 183.948,54.63 184.177,54.401 184.177,42.6 183.948,42.371 183.948,38.785 182.538,37.375 v1@182.525,37.375
  Bottom Layer w0.254: v1(177.325,37.6) 181.4,37.6 181.6,37.4 v1(182.55,37.4) ; v1@178.125,56.35 v1(178.125,58.8)
FMC_D0: U1.2 U2.29 U5.116 U20.18 | length 113.2
  Top Layer w0.254: U5.116@134.351,54.147 134.351,51.39 136.075,49.666 136.075,41.737 136.35,41.462 v1(136.35,41.425) ; U2.29@161.468,28.156 163.031,28.156 ; v1(162.127,45.714) U1.2@162.127,40.487 162.127,32.173 163.425,30.875 ; 163.056,28.131 163.45,28.525 163.45,30.85 ; v1(196.975,56.925) 198.275,56.925 198.9,57.55 U20.18@198.9,58.4
  Bottom Layer w0.254: v1@136.3,41.425 136.3,40.575 136.715,40.16 154.985,40.16 160.462,45.637 162.05,45.637 v1(162.127,45.714) 162.171,45.671 168.46,45.671 168.837,46.048 177.577,46.048 179.8,43.825 183.4,43.825 184.95,42.275 189.075,42.275 189.55,42.75 189.55,51.3 195.175,56.925 v1(196.975,56.925)
FMC_D1: U1.4 U2.30 U5.117 U20.17 | length 113.9
  Top Layer w0.254: U5.117@133.851,54.147 133.851,51.25 135.6,49.501 135.6,41.1 135.975,40.725 137.05,40.725 v1(137.125,40.8) ; U2.30@161.468,27.656 163.806,27.656 ; v1(163.675,46.25) 163.675,40.585 163.75,40.51 U1.4@163.727,40.487 163.727,38.548 164.35,37.925 164.35,28.2 ; 163.831,27.631 164.375,28.175 ; v1(188.5,43.75) v1@190.125,43.75 ; v1(197.175,56.175) 198.25,56.175 199.4,57.325 U20.17@199.4,58.4
  Bottom Layer w0.254: v1(137.125,40.8) 137.178,40.747 150.94,40.747 156.482,46.289 162.366,46.289 162.38,46.275 163.65,46.275 v1(163.675,46.25) 163.802,46.123 168.273,46.123 168.65,46.5 178,46.5 180.175,44.325 184.075,44.325 184.65,43.75 v1(188.5,43.75) ; v1@190.075,43.775 190.075,51.1 195.15,56.175 v1(197.175,56.175)
  other v1: 190.125,43.8
FMC_D2: U1.5 U2.31 U5.164 U20.16 | length 128.4
  Top Layer w0.254: U5.164@112.526,48.822 113.997,48.822 v1@114.425,49.25 ; U2.31@161.468,27.156 164.406,27.156 ; 164.406,27.131 165.05,27.775 ; v1(164.575,47.175) 164.575,40.535 U1.5@164.527,40.487 164.527,38.798 165.05,38.275 165.05,27.8 ; v1(188.475,44.5) 190.75,44.5 v1@190.8,44.5 ; v1(197.275,55.375) 198.1,55.375 199.9,57.175 U20.16@199.9,58.4
  Bottom Layer w0.254: v1(114.4,49.2) 114.4,47.575 115.052,46.923 118.904,46.923 118.906,46.925 134.047,46.925 138.227,42.745 152.298,42.745 156.303,46.75 163.362,46.75 163.862,47.25 164.5,47.25 v1(164.575,47.175) 165.175,46.575 167.227,46.575 167.627,46.975 178.2,46.975 180.325,44.85 184.189,44.85 184.539,44.5 v1(188.475,44.5) ; v1(190.65,44.55) 190.65,50.911 195.114,55.375 v1@197.3,55.375
FMC_D3: U1.7 U2.32 U5.165 U20.14 | length 129.1
  Top Layer w0.254: U5.165@112.526,48.322 114.553,48.322 v1@115.1,47.775 ; U2.32@161.468,26.656 165.106,26.656 ; 165.131,26.631 166.152,27.652 ; v1(166.075,47.15) 166.075,40.539 U1.7@166.127,40.487 166.127,27.677 ; v1(188.45,45.275) v1@191.35,45.275 ; v1@197.3,54.55 198,54.55 200.9,57.45 U20.14@200.9,58.4
  Bottom Layer w0.254: v1(115,47.9) 115.025,47.9 115.55,47.375 118.717,47.375 118.719,47.377 134.234,47.377 138.414,43.197 151.947,43.197 156,47.25 162.675,47.25 163.202,47.777 164.973,47.777 ; v1(166.075,47.15) 165.6,47.15 164.973,47.777 ; v1(188.45,45.275) 188.4,45.325 180.575,45.325 178.45,47.45 167.463,47.45 167.138,47.125 166.1,47.125 166.1,47.186 166.06,47.225 165.525,47.225 164.973,47.777 ; v1@191.25,45.25 191.225,45.275 191.225,50.625 195.175,54.575 v1(197.3,54.575)
  other v1: 191.275,45.275
FMC_D4: U1.8 U2.41 U5.79 U20.13 | length 117.9
  Top Layer w0.254: U5.79@141.676,39.822 150.329,39.822 151.521,41.014 151.896,41.014 157.777,46.895 157.777,46.902 159.275,48.4 166.275,48.4 166.927,47.748 U1.8@166.927,40.487 166.95,40.464 166.95,38.825 ; U2.41@161.468,22.156 164.706,22.156 ; 164.731,22.131 166.85,24.25 ; v1(188.45,46.025) v1@191.9,46.025 ; v1@197.175,53.9 197.25,53.825 v1(197.3,53.825) 198,53.825 201.4,57.225 U20.13@201.4,58.4 ; 166.85,24.25 166.85,38.725 166.95,38.825 ; 166.85,24.25 166.825,38.7 166.95,38.825
  Bottom Layer w0.254: v1(166.9,47.7) 167.102,47.902 178.773,47.902 180.898,45.777 188.139,45.777 188.387,46.025 v1(188.45,46.025) ; v1(191.825,46.025) 191.7,46.15 191.7,50.45 195.075,53.825 v1(197.3,53.825)
FMC_D5: U1.10 U2.42 U5.80 U20.12 | length 117.3
  Top Layer w0.254: U5.80@141.676,40.322 150.19,40.322 151.334,41.466 151.709,41.466 157.325,47.082 157.325,47.458 158.72,48.852 168.073,48.852 168.527,48.398 U1.10@168.527,40.487 168.527,38.873 168.875,38.525 168.875,35.225 ; U2.42@161.468,21.656 165.131,21.656 ; 165.156,21.631 167.6,24.075 167.6,33.95 168.875,35.225 ; 167.575,24.05 167.55,33.9 168.875,35.225 ; v1(188.375,46.8) v1@192.35,46.8 ; v1(202.325,57.8) 202.675,57.45 U20.12@202.675,57.125
  Bottom Layer w0.254: v1(168.45,48.525) 168.904,48.525 169.075,48.354 178.996,48.354 181.121,46.229 187.804,46.229 v1(188.375,46.8) ; v1(192.4,46.8) 192.152,47.048 192.152,50.127 195.175,53.15 197.45,53.15 202.1,57.8 v1(202.325,57.8)
FMC_D6: U1.11 U2.43 U5.81 U20.11 | length 117.1
  Top Layer w0.254: U5.81@141.676,40.822 150.022,40.822 151.118,41.918 151.522,41.918 156.873,47.27 156.873,47.673 158.504,49.304 169.146,49.304 169.327,49.123 U1.11@169.327,40.487 169.327,34.652 ; U2.43@161.468,21.156 165.781,21.156 ; 165.806,21.131 168.225,23.55 168.225,33.55 169.327,34.652 ; 168.2,23.525 168.175,33.5 169.327,34.652 ; v1(188.35,47.55) v1@192.775,47.55 ; v1@197.375,52.525 201.475,56.625 U20.11@202.675,56.625
  Bottom Layer w0.254: v1(169.25,49.15) 169.25,49.106 169.55,48.806 179.219,48.806 181.344,46.681 187.106,46.681 187.8,47.375 188.175,47.375 v1(188.35,47.55) ; v1(192.775,47.525) 192.7,47.6 192.7,49.95 195.3,52.55 v1(197.475,52.55)
FMC_D7: U1.13 U2.44 U5.84 U20.10 | length 116.2
  Top Layer w0.254: U5.84@141.676,42.322 150.772,42.322 150.82,42.37 150.82,42.545 156.246,47.971 156.271,47.971 158.056,49.756 170.294,49.756 v1(170.625,49.425) 170.928,49.122 U1.13@170.928,40.487 170.928,38.553 170.075,37.7 170.075,34.45 168.75,33.125 ; U2.44@161.468,20.656 166.481,20.656 ; 166.506,20.631 168.775,22.9 168.75,33.125 ; 168.75,22.875 168.75,33.125 ; v1(188.375,48.325) v1@193.25,48.325 ; v1@198.45,52.9 198.45,52.961 201.614,56.125 U20.10@202.675,56.125
  Bottom Layer w0.254: v1(170.625,49.425) 179.5,49.425 181.792,47.133 186.758,47.133 187.95,48.325 v1(188.375,48.325) ; v1(193.275,48.3) 193.275,49.725 195.4,51.85 198.075,51.85 198.525,52.3 v1(198.525,52.825)
FMC_D8: U1.42 U5.85 U20.31 | length 62.4
  Top Layer w0.254: U5.85@141.676,42.822 150.172,42.822 157.575,50.225 169.25,50.225 170.1,51.075 170.628,51.075 170.928,51.375 U1.42@170.928,52.487 170.925,52.49 170.925,55.425 172.525,57.025 v1(182.45,57.025) ; v1(188.325,54.975) 189.15,54.15 189.312,54.15 189.314,54.153 189.834,54.153 189.837,54.15 190.925,54.15 190.95,54.125 U20.31@194.625,54.125
  Bottom Layer w0.254: v1(182.45,57.025) 182.475,57 186.3,57 v1@188.312,54.987
FMC_D9: U1.44 U5.86 U20.29 | length 69.2
  Top Layer w0.254: U5.86@141.676,43.322 149.747,43.322 157.102,50.677 169.002,50.677 169.327,51.002 U1.44@169.327,52.487 169.327,57.823 v1(169.125,58.025) ; v1@190.05,54.725 v1(190.075,54.725) 192.525,54.725 192.925,55.125 U20.29@194.625,55.125
  Bottom Layer w0.254: v1@169.1,58.025 169.1,60.625 169.667,61.192 176.883,61.192 179.725,58.35 185.763,58.35 188.586,55.527 189.273,55.527 v1(190.075,54.725)
FMC_D10: U1.45 U5.87 U20.28 | length 69
  Top Layer w0.254: U5.87@141.676,43.822 149.147,43.822 156.454,51.129 168.256,51.129 168.527,51.4 U1.45@168.527,52.487 168.527,57.398 168.2,57.725 v1(168.2,58.05) ; v1@190.6,55.325 192.25,55.325 192.55,55.625 U20.28@194.625,55.625
  Bottom Layer w0.254: v1@168.2,58.025 v1(168.2,58.05) 168.2,60.6 169.244,61.644 177.07,61.644 179.912,58.802 186.087,58.802 188.91,55.979 189.996,55.979 v1(190.625,55.35)
FMC_D11: U1.47 U5.88 U20.27 | length 72.7
  Top Layer w0.254: U5.88@141.676,44.322 146.772,44.322 149.938,47.487 149.925,47.5 149.925,48.597 152.077,50.749 152.077,54.713 153.495,56.13 158.82,56.13 159.825,55.125 161.2,55.125 v1@161.4,55.325 ; U1.47@166.927,52.487 v1@166.927,54.823 ; v1@191.075,56 v1(191.125,56) 192.225,56 192.35,56.125 U20.27@194.625,56.125
  Bottom Layer w0.254: v1(161.475,55.35) 165.35,55.35 165.95,54.75 v1(166.95,54.75) 167.4,55.2 167.4,60.625 168.871,62.096 177.283,62.096 180.125,59.254 186.274,59.254 189.097,56.431 190.694,56.431 v1(191.125,56)
FMC_D12: U1.48 U5.89 U20.26 | length 72.5
  Top Layer w0.254: U5.89@141.676,44.822 146.547,44.822 149.427,47.702 149.427,48.738 151.625,50.936 151.625,54.9 153.325,56.6 159.05,56.6 159.725,55.925 v1(160.825,55.925) v1@160.875,55.925 ; U1.48@166.127,52.487 166.127,55.352 v1(166.275,55.5) ; v1@191.7,56.625 191.8,56.625 U20.26@194.625,56.625
  Bottom Layer w0.254: v1(160.825,55.925) 165.8,55.925 v1@166.25,55.475 ; v1(166.275,55.5) 166.948,56.173 166.948,60.998 168.498,62.548 177.47,62.548 180.312,59.706 186.462,59.706 189.27,56.898 191.402,56.898 v1(191.675,56.625)
FMC_D13: U1.50 U5.108 U20.25 | length 69.9
  Top Layer w0.254: U5.108@138.351,54.147 138.351,56.251 139.399,57.299 159.3,57.299 159.737,56.862 159.763,56.862 160.125,56.5 v1(161.45,56.5) v1@161.475,56.5 ; v1(163.425,56.5) 163.425,55.375 164.527,54.273 U1.50@164.527,52.487 ; v1@192.075,57.45 192.55,57.45 192.875,57.125 U20.25@194.625,57.125
  Bottom Layer w0.254: v1(161.45,56.5) v1(163.425,56.5) 163.425,58.375 168.05,63 177.657,63 180.499,60.158 186.667,60.158 189.475,57.35 192,57.35 v1(192.075,57.425)
FMC_D14: U1.51 U5.109 U20.24 | length 72.8
  Top Layer w0.254: U5.109@137.851,54.147 137.851,56.39 139.212,57.751 160.299,57.751 160.3,57.75 160.575,57.75 v1(161.075,57.25) ; v1(162.75,57.2) 162.75,55.4 163.727,54.423 U1.51@163.727,52.487 ; v1@192.6,58.05 v1(192.675,58.05) 194.15,58.05 194.45,57.75 195.9,57.75 U20.24@195.9,58.4
  Bottom Layer w0.254: v1(161.075,57.25) 162.7,57.25 v1(162.75,57.2) 162.75,58.339 167.863,63.452 177.845,63.452 180.687,60.61 186.854,60.61 189.662,57.802 191.427,57.802 191.675,58.05 v1(192.675,58.05)
FMC_D15: U1.53 U5.110 U20.22 | length 75.6
  Top Layer w0.254: U5.110@137.351,54.147 137.351,56.53 139.025,58.203 161.722,58.203 162.127,57.798 U1.53@162.127,52.487 ; U20.22@196.9,58.4 v1@196.9,60.025
  Bottom Layer w0.254: v1(162.05,57.9) 162.05,58.45 167.504,63.904 178.032,63.904 180.874,61.062 187.041,61.062 189.849,58.254 191.054,58.254 191.625,58.825 194.1,58.825 195.275,60 v1(196.825,60)
FMC_NBL0: U1.15 U5.200 | length 90.9
  Top Layer w0.254: U5.200@112.526,30.822 114.089,30.822 115.304,32.037 115.304,43.309 118.158,46.163 118.158,47.42 v1(118.824,48.085) ; v1(172.225,50.075) 172.525,49.775 172.525,40.49 U1.15@172.528,40.487
  Bottom Layer w0.254: v1(118.824,48.085) 119.02,47.889 120.756,47.889 ; 120.231,47.889 120.756,47.889 ; v1(172.225,50.075) 172.15,50.075 169.775,52.45 155.75,52.45 146.949,43.649 138.601,43.649 134.362,47.889 120.756,47.889
FMC_NBL1: U1.39 U5.201 | length 84.6
  Top Layer w0.254: U5.201@112.526,30.322 114.231,30.322 115.756,31.847 115.756,43.121 120.35,47.715 v1@120.35,48.887 ; v1(173.325,50.975) 173.325,52.389 173.375,52.439 U1.39@173.328,52.487
  Bottom Layer w0.254: v1(120.35,48.989) 134.541,48.989 138.976,44.554 146.479,44.554 155.325,53.4 172.225,53.4 173.325,52.3 v1(173.325,50.975)
FMC_NCE3: R7.1 U2.9 U5.178 | length 140.2
  Top Layer w0.254: U5.178@112.526,41.822 113.872,41.822 114.35,42.3 114.35,43.633 117.254,46.538 117.254,48.679 117.925,49.35 v1(119.125,49.35) ; 181.618,22.631 181.637,22.65 183.85,22.65 184.225,22.275 185.525,22.275 185.525,22.925 185.675,23.075 188.625,23.075 189.35,23.8 189.35,29.15 188.5,30 186.875,30 185.771,31.104 185.771,51.389 186.025,51.643 186.025,60.45 v1(184.825,61.65)
  Bottom Layer w0.254: v1(119.125,49.35) 119.388,49.35 119.663,49.625 134.544,49.625 139.163,45.006 146.281,45.006 155.275,54 158.475,54 159.775,55.3 159.775,58.325 165.806,64.356 178.219,64.356 180.975,61.6 184.775,61.6 v1(184.825,61.65)
FMC_NE1: R39.2 U20.37 | length 5.2
  Top Layer w0.254: R39.2@194.25,45.805 194.25,47.975 195.9,49.625 U20.37@195.9,50.35
FMC_NOE: U2.8 U5.168 U20.35 | length 152.3
  Top Layer w0.254: U5.168@112.526,46.822 115.247,46.822 115.725,47.3 v1(115.725,49.3) v1@115.725,49.425 ; 181.618,22.131 181.662,22.175 183.3,22.175 v1(183.45,22.025) ; v1@184.275,20.675 189.475,20.675 190.4,21.6 190.4,30.65 189.8,31.25 187.236,31.25 186.675,31.811 186.675,51.014 186.929,51.268 186.929,51.629 187.2,51.9 v1(187.2,53.325) 187.2,54.1 187.075,54.225 187.075,61.375 v1(186.2,62.25) ; v1(188.45,53.95) 188.45,53.874 190.199,52.125 U20.35@194.625,52.125
  Bottom Layer w0.254: v1(115.725,49.3) 118.125,49.3 118.989,50.164 134.644,50.164 139.351,45.458 145.908,45.458 155,54.55 158.2,54.55 159.05,55.4 159.05,58.6 165.325,64.875 178.6,64.875 181.25,62.225 v1@186.225,62.225 ; v1(183.45,22.025) 183.45,21.5 v1(184.325,20.625) ; v1(187.2,53.325) 187.825,53.95 v1(188.45,53.95)
FMC_NWAIT: U2.7 U5.172 | length 142.8
  Top Layer w0.254: U5.172@112.526,44.822 114.9,44.822 116.802,46.725 116.802,49.052 v1@118.025,50.275 ; 181.618,21.631 181.662,21.675 182.8,21.675 183.275,21.2 189.025,21.2 189.875,22.05 189.875,30.25 189.4,30.725 186.8,30.725 186.223,31.302 186.223,51.201 186.477,51.455 186.477,54.098 186.5,54.121 186.5,60.875 185.325,62.05 v1(185.325,62.825)
  Bottom Layer w0.254: v1(118.075,50.3) 118.391,50.616 134.831,50.616 139.538,45.91 145.71,45.91 152.6,52.8 152.611,52.8 154.813,55.002 154.952,55.002 155.1,55.15 157.6,55.15 158.35,55.9 158.35,59.25 164.5,65.4 178.825,65.4 181.35,62.875 185.275,62.875 v1(185.325,62.825)
FMC_NWE: U2.18 U5.169 U20.36 | length 139
  Top Layer w0.254: U5.169@112.526,46.322 115.76,46.322 116.35,46.912 116.35,49.737 v1(116.95,50.337) ; 181.618,27.131 183.531,27.131 183.875,27.475 v1(183.875,28.775) ; v1@187.277,32.975 187.277,33.523 187.231,33.569 187.231,50.931 187.938,51.637 ; v1(187.55,62.1) 187.55,54.525 187.85,54.225 187.85,51.725 187.938,51.637 ; U20.36@194.625,51.625 187.95,51.625 187.938,51.637
  Bottom Layer w0.254: v1(116.95,50.337) 117.681,51.068 135.019,51.068 139.725,46.362 144.262,46.362 153.502,55.602 157.127,55.602 157.85,56.325 157.85,59.65 164.075,65.875 178.989,65.875 181.314,63.55 186.375,63.55 187.55,62.375 ; v1@183.875,28.725 183.875,31.825 185.1,33.05 v1(187.25,33.05)
FMC_SDCKE0: U1.37 U5.38 | length 87.9
  Top Layer w0.254: U5.38@132.851,24.997 132.851,26.788 136.9,30.837 v1(136.9,30.925) ; U1.37@174.928,52.487 174.928,54.74 175.225,55.037 182.263,55.037 183.15,54.15 v1(183.15,43.025) ; v1@183.075,31.025 183.075,35.1 v1(183.2,35.225)
  Bottom Layer w0.254: v1(136.9,30.925) 136.95,30.975 v1@183.025,30.975 ; v1(183.15,43.025) 183.15,35.275 v1(183.2,35.225)
  other v1: 183.05,31.025
FMC_SDCLK: U1.38 U5.135 | length 64
  Top Layer w0.254: U5.135@124.851,54.147 U5.135@124.851,54.312 ; U5.135@124.876,54.312 124.876,56.138 125.575,56.837 125.575,59.573 126.917,60.916 172.808,60.916 ; 173.721,60.916 172.808,60.916 ; U1.38@174.128,52.487 v1(174.128,54.109) ; v1(174.128,60.59) 173.801,60.916 172.808,60.916
  Bottom Layer w0.254: v1(174.128,54.109) v1(174.128,60.59)
FMC_SDNCAS: U1.17 U5.191 | length 88.9
  Top Layer w0.254: U5.191@112.526,35.322 113.985,35.322 114.852,36.189 114.852,43.496 117.706,46.35 117.706,48.293 v1(117.925,48.512) ; v1(174.1,50.125) 174.1,40.515 U1.17@174.128,40.487
  Bottom Layer w0.254: v1(117.925,48.512) 118.125,48.712 119.429,48.712 119.8,48.341 134.549,48.341 138.789,44.101 146.726,44.101 155.55,52.925 170.275,52.925 172.85,50.35 173.875,50.35 v1(174.1,50.125)
FMC_SDNE0: R6.1 U1.19 U5.37 | length 58.4
  Top Layer w0.254: U5.37@132.351,24.997 132.351,26.927 135.928,30.505 v1(135.928,31.457) ; R6.1@175.725,37.612 R6.1@175.728,37.615
  Top Layer w0.3: R6.1@175.725,37.612 176.188,37.612 176.853,36.947 v1@176.853,31.622
  Top Layer w0.4: R6.1@175.728,37.615 U1.19@175.728,40.487
  Bottom Layer w0.254: v1(135.928,31.457) 135.971,31.5 v1@176.775,31.5
  other v1: 176.875,31.6
FMC_SDNRAS: U1.18 U5.70 | length 37.8
  Top Layer w0.254: U5.70@141.676,35.322 150.305,35.322 152.833,37.85 153.207,37.85 156.818,41.462 v1(157.8,41.462) ; v1(174.925,42.125) 174.925,40.684 175.025,40.584 U1.18@174.928,40.487
  Bottom Layer w0.254: v1(157.8,41.462) 174.262,41.462 v1(174.925,42.125)
FMC_SDNWE: U1.16 U5.35 | length 54.8
  Top Layer w0.254: U5.35@131.351,24.997 131.351,26.567 134.956,30.172 v1(134.956,31.457) ; v1@173.325,32.075 U1.16@173.325,40.034
  Bottom Layer w0.254: v1(134.956,31.457) 134.956,31.993 135.011,32.048 v1@173.298,32.048
  other v1: 173.3,32.075